# Altium PCB ENCODER.PcbDoc
Units mm, origin at the board's own origin, x right, y up, seen from the top; angles counter-clockwise.
Board outline 60.13 x 20.13 mm, 2 copper layers (Top Layer, Bottom Layer), stack 1.671 mm thick; 1 components, 3 nets, 9 pads, 0 vias.
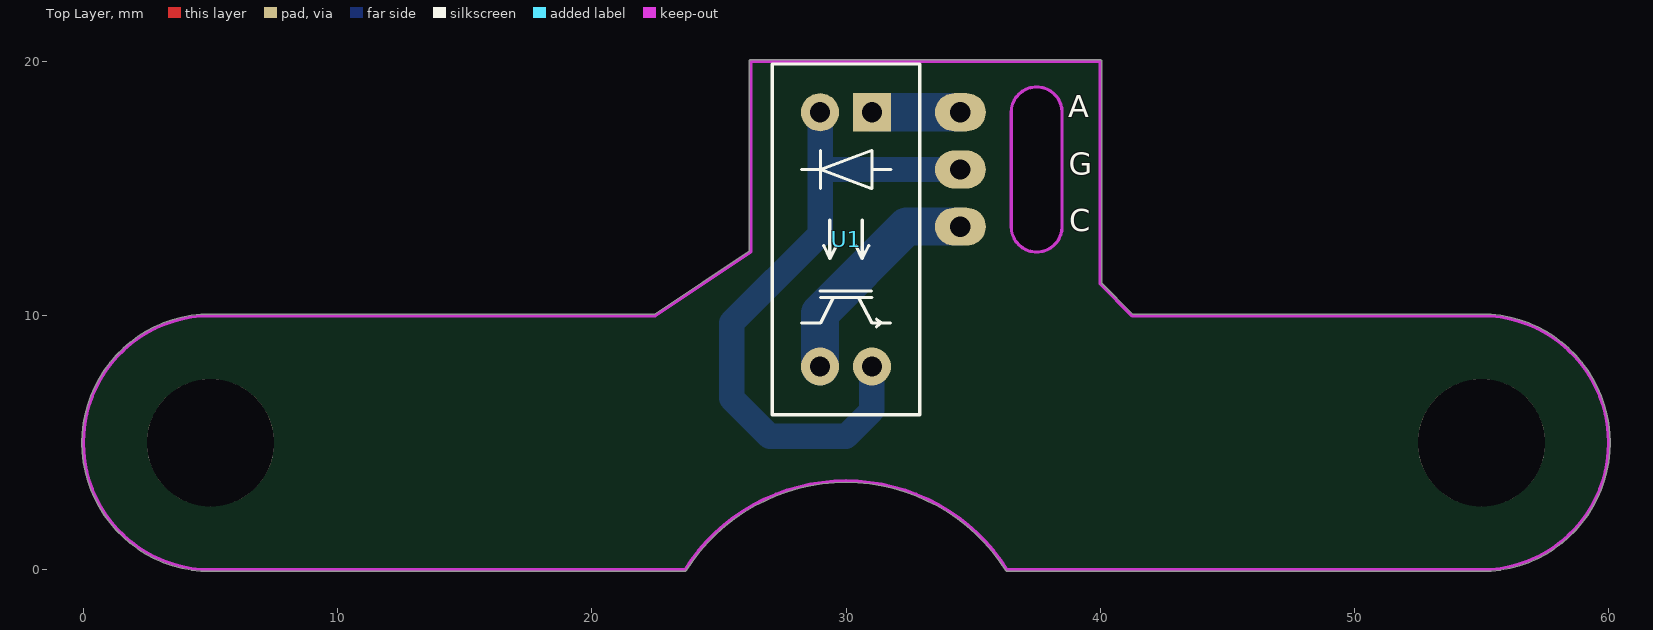
[diagram p0: Top Layer view]
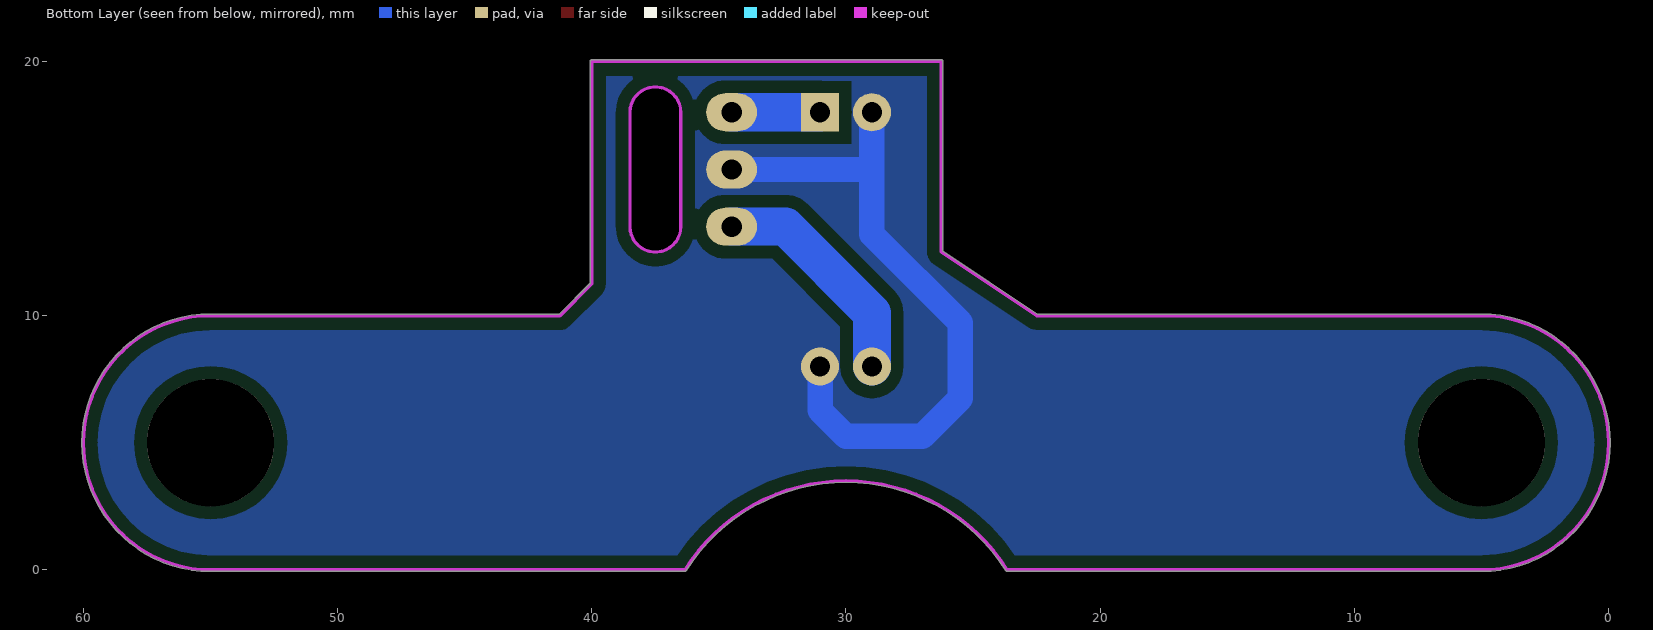
[diagram p1: Bottom Layer view, seen from below]

## Layer stack, top to bottom
Top Solder: solder mask 0.0102, Solder Resist, Dk 3.5
Top Layer: signal copper 0.0356
Dielectric 1: dielectric 1.6, FR-4, Dk 4.8
Bottom Layer: signal copper 0.0356
Bottom Solder: solder mask 0.0102, Solder Resist, Dk 3.5

## Board outline
5,-0.064 23.656,-0.064 ccw(c23.656,0) 23.71,-0.034 cw(c30,-4) 36.29,-0.034 cw(c30,-4) 36.29,-0.034 ccw(c36.344,0) 36.345,-0.064 55,-0.064 ccw(c55,5) 60.064,5 ccw(c55,5) 55,10.064 41.276,10.064 40.064,11.276 40.064,20 ccw(c40,20) 40,20.064 26.25,20.064 ccw(c26.25,20) 26.186,20 26.186,12.534 22.481,10.064 5,10.064 ccw(c5,5) -0.064,5 ccw(c5,5)
cut-out: 36.5,18 cw(c37.5,18) 37.5,19 cw(c37.5,18) 38.5,18 38.5,13.5 cw(c37.5,13.5) 37.5,12.5 cw(c37.5,13.5) 36.5,13.5

## Design rules (kind name [scope] priority, off if disabled: settings)
Clearance [All] p1: gap=0.5
PlaneConnect [All] p1: planeconnectstyle=Direct reliefexpansion=0.508 reliefentries=4 reliefconductorwidth=0.254 reliefairgap=0.254
PolygonConnect [All] p1: connectstyle=Direct reliefconductorwidth=0.254 reliefentries=4 polygonreliefangle="90 Angle" airgapwidth=0.254
RoutingLayers [All] p1: top layer_v5=FALSE bottom layer_v5=TRUE
RoutingVias [All] p1: holewidth=0.711 width=1.27 viastyle="Through Hole" minholewidth=0.711 minwidth=1.27 maxholewidth=0.711 maxwidth=1.27
SolderMaskExpansion [All] p1: expansion=0.102
Width [All] p1: maxlimit=254 minlimit=0.254 preferedwidth=0.254
28 further rules are at their usual default settings.

## Components (designator, comment, footprint, x,y, rotation, side; value= is the part's Value field where it differs from the comment)
U1 "WYC-H206" ENCODER-WYC-H206 30,13 r270 top

## Footprints (in the part's own frame and the unit in brackets; to place one, negate y for a bottom-side part, rotate by r counter-clockwise, add the part's x,y. Pads: shape width x height; smd on the part's side, far side on the other; paste and mask are expansions set on the pad)
ENCODER-WYC-H206 [mm]
  rect 1.5x1.5 hole 0.8: 1(-5,1.02)
  round 1.5 hole 0.8: 2(-5,-1.02) 4(5,1.02) 5(5,-1.02)
  silkscreen extent -6.9,-2.9 6.9,2.9, body extent -6.9,-2.91 6.9,2.89, height 12

## Part data
U1: library part Optoisolator1, "4-Pin Phototransistor Optocoupler"

## Free pads (board coordinates)
  round 5 hole 5: 0(5,5) 1(55,5)
  oval 2x1.5 hole 0.8: 6(34.5,13.5) 6(34.5,15.75) 6(34.5,18)

## Nets (pads, with @x,y where several pads share a name; then routed paths per layer and width w, separated by ;. In a path a pad name is that pad's centre, name@x,y a point inside that pad or via, vN(x,y) a via of type N, cw(c..) or ccw(c..) an arc to the next point about the centre after c; other vN are vias at no path point)
NetP1_1: pad.6@34.5,18 U1.1 | length 3.5
  Bottom Layer w1.5: U1.1 pad.6@34.5,18
NetP1_2: pad.6@34.5,13.5 U1.5 | length 9
  Bottom Layer w1.5: U1.5 28.98,10.095 32.385,13.5 pad.6@34.5,13.5
NetP1_3: pad.6@34.5,15.75 U1.2 U1.4 | length 25.9
  Bottom Layer w1: U1.2 28.98,16 ; U1.4 31.02,6.27 30,5.25 27,5.25 25.5,6.75 25.5,9.718 28.98,13.198 28.98,16 ; pad.6@33.75,15.75 29.23,15.75 28.98,16

## Polygon pours and split planes (outlines as drawn)
NetP1_3 on Bottom Layer " " (solid, remove dead copper, pour order 1): -1.25,21.25 60,21.25 60,-1.25 -1.25,-1.25

## Keep-outs
Keep-Out Layer:
  lines w0.127: 42.5,10 41.25,10 ; 41.25,10 55,10 cw(c55,5) 60,5 cw(c55,5) 55,0 36.344,0 ccw(c30,-4) 23.656,0 5,0 cw(c5,5) 0,5 cw(c5,5) 5,10 22.5,10 26.25,12.5 26.25,20 35.25,20 40,20 40,18.75 40,11.25 41.25,10 ; 36.5,13.5 ccw(c37.5,13.5) 38.5,13.5 38.5,18 ccw(c37.5,18) 36.5,18 36.5,13.5

## Silkscreen, mask and mechanical layers (free items; w line width, h text height)
Top Overlay:
  text "A" at 38.75,17.519 h1.5
  text "G" at 38.754,15.253 h1.5
  text "C" at 38.774,13.019 h1.5
Bottom Solder:
  text "ENCODER - H206" at 50.25,6.147 h2.5
  text "Ver 2.0" at 46.25,3 h2.5
  text "Han 1601" at 19.5,2.565 h2.5